# Altium PCB Carrier with Power Supply.PcbDoc (part 1 of 4)
Units mm, origin at the board's own origin, x right, y up, seen from the top; angles counter-clockwise.
Board outline 756.27 x 168 mm, 6 copper layers (Top Layer, Signal Layer 2, Signal Layer 1, VCC, GND, Bottom Layer), stack 1.551 mm thick; 145 components, 326 nets, 1962 pads, 760 vias.
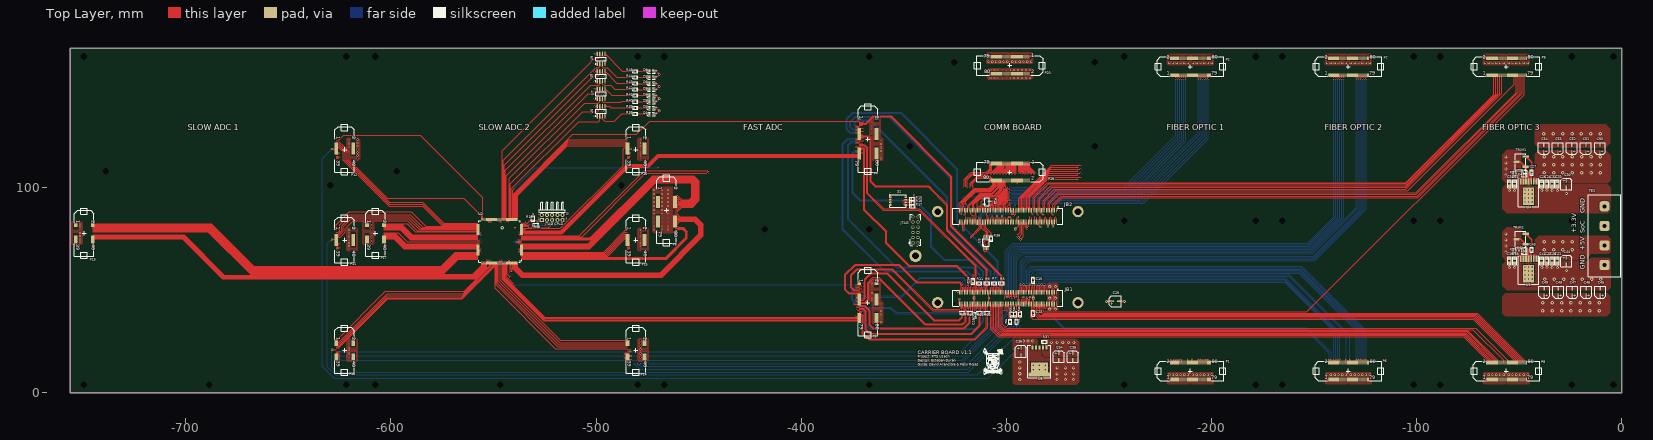
[diagram p0: Top Layer view]
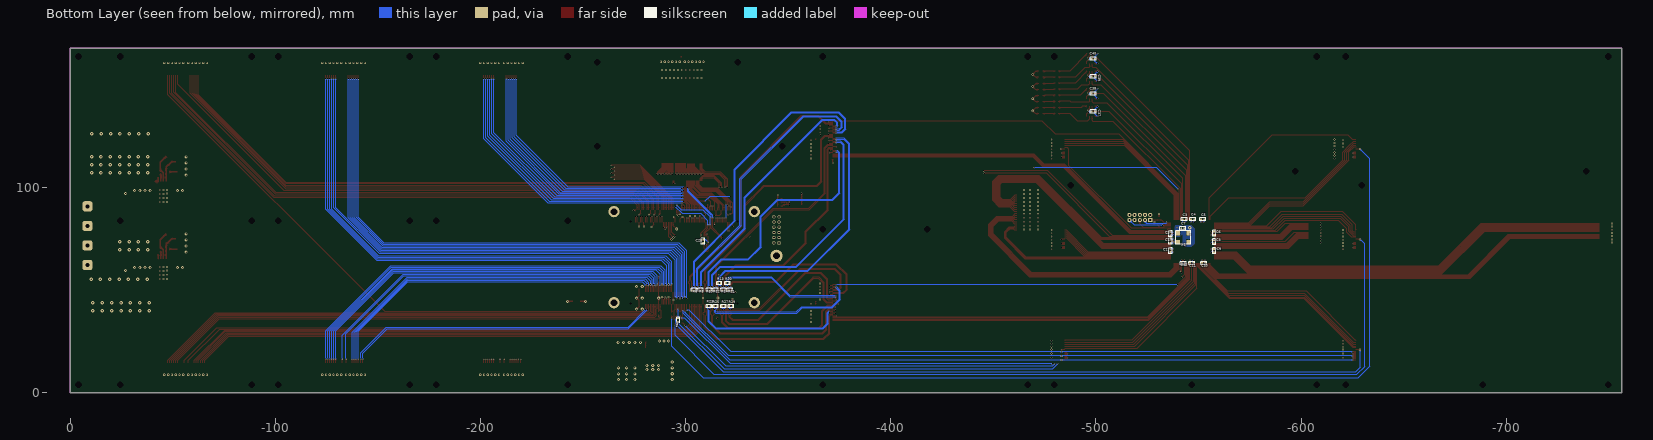
[diagram p1: Bottom Layer view, seen from below]
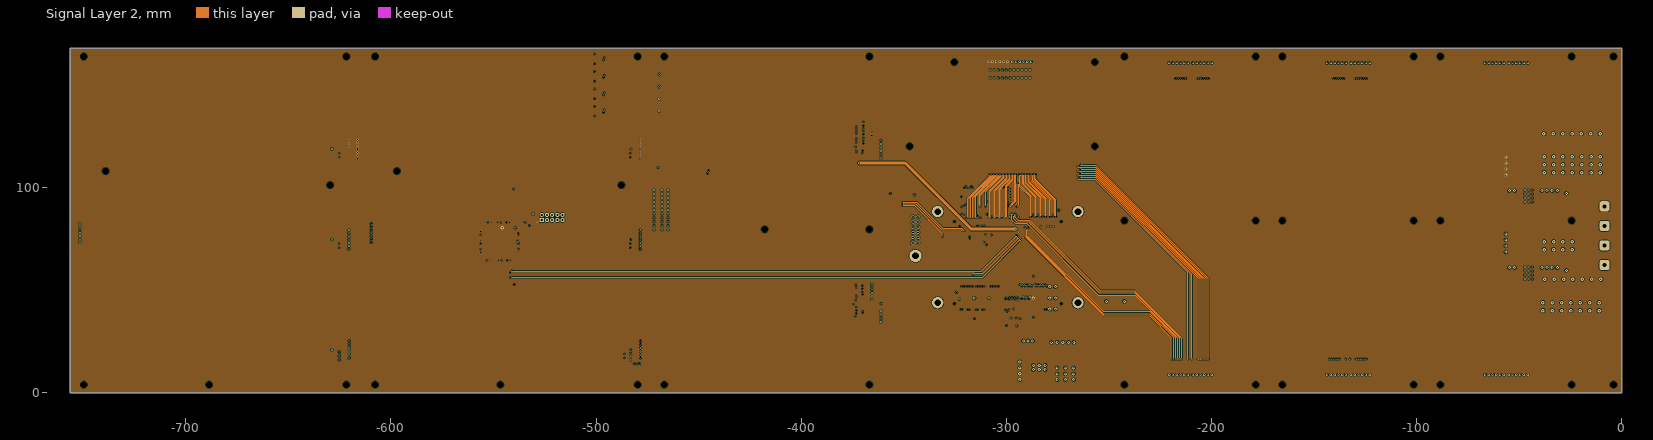
[diagram p2: Signal Layer 2]
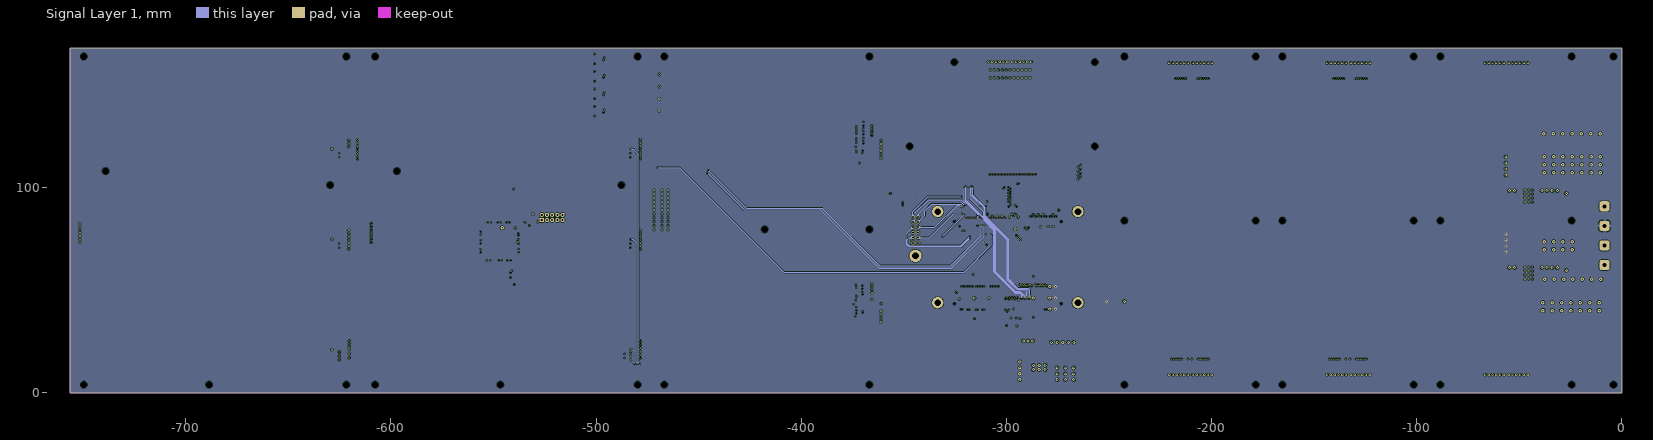
[diagram p3: Signal Layer 1]
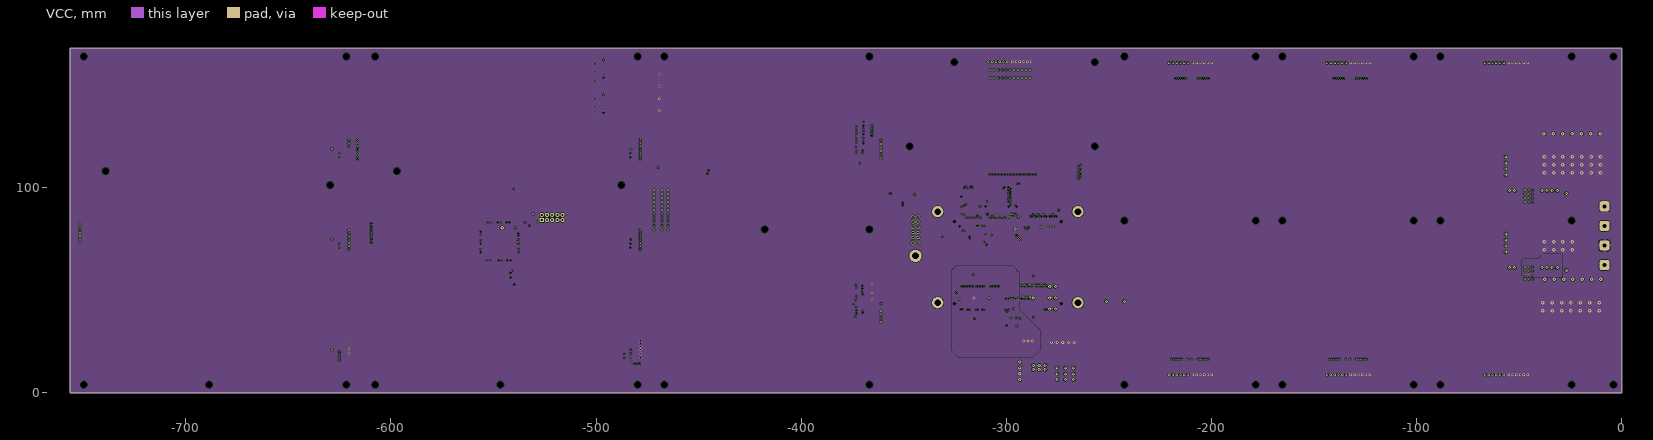
[diagram p4: VCC]
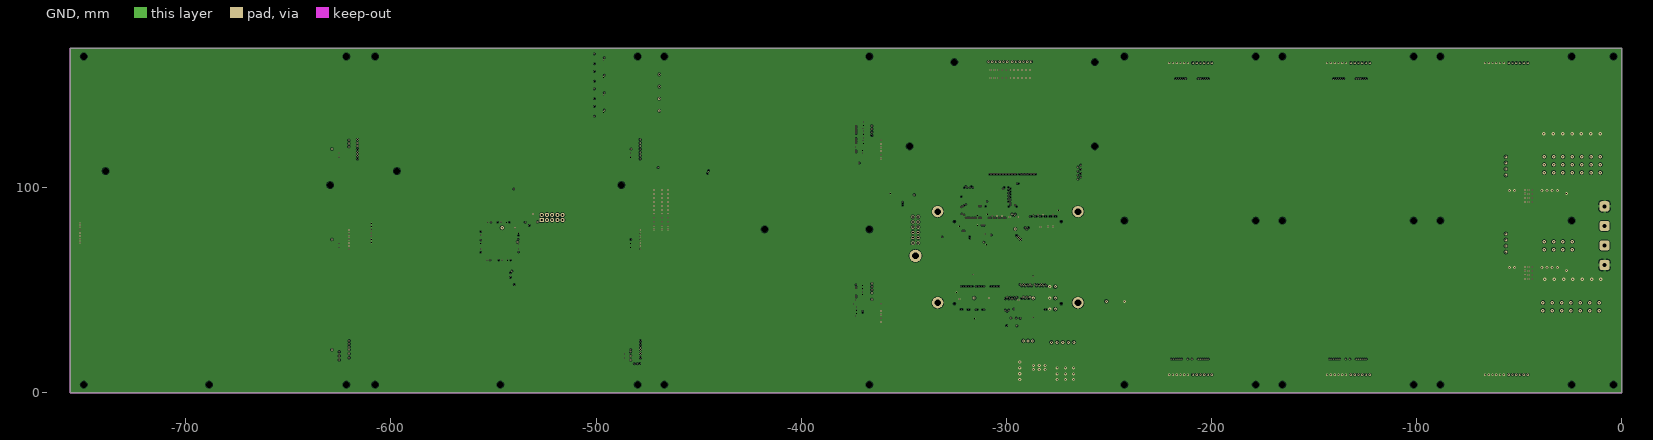
[diagram p5: GND]
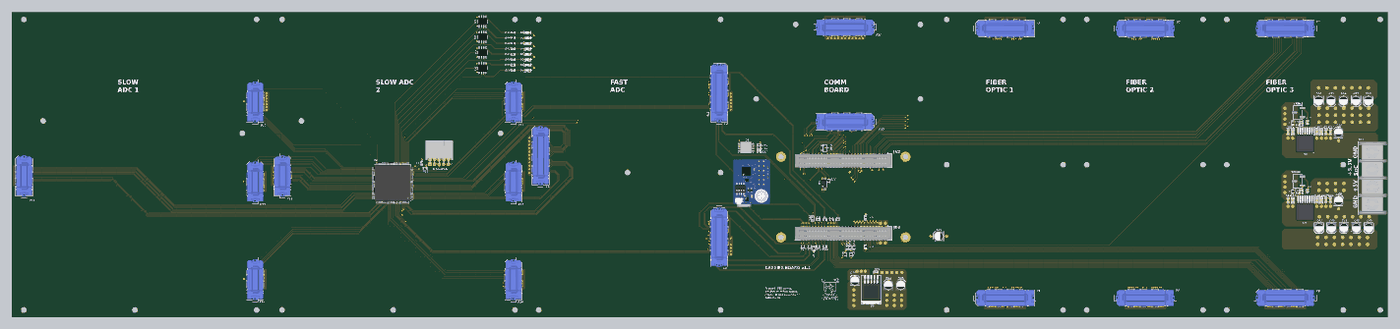
[diagram p9: 3D render of the assembled board from above, using the file's embedded part models]
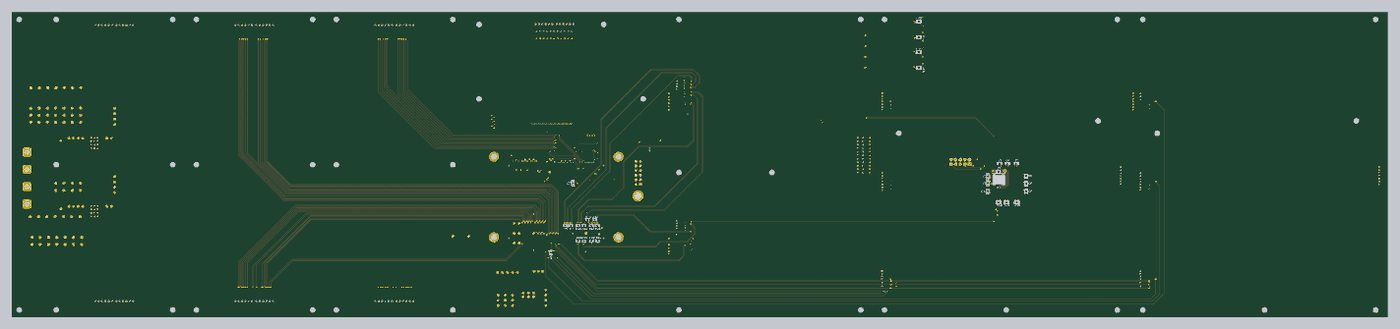
[diagram p10: 3D render of the assembled board from below, using the file's embedded part models]

## Layer stack, top to bottom
Top Solder: solder mask 0.0102, Solder Resist, Dk 3.5
Top Layer: signal copper 0.0356
Dielectric 4: dielectric 0.254, Dk 4.2
Signal Layer 2: signal copper 0.036
Dielectric 5: dielectric 0.254, Dk 4.2
Signal Layer 1: signal copper 0.036
Dielectric 1: dielectric 0.32, FR-4, Dk 4.8
VCC: signal copper 0.036
Dielectric 2: dielectric 0.254, Dk 4.2
GND: signal copper 0.036
Dielectric 3: dielectric 0.254, Dk 4.2
Bottom Layer: signal copper 0.0356
Bottom Solder: solder mask 0.0102, Solder Resist, Dk 3.5

## Board outline
-756.267,0 0,0 0,168 -756.267,168

## Design rules (kind name [scope] priority, off if disabled: settings)
Clearance [All] p1: gap=0.254 except(0.127: Track-Track Track-SMDPad Track-Via; 0.2: SMDPad-SMDPad Via-Via)
ComponentClearance [All] p1: gap=0 collisioncheckmode=3 verticalgap=0 showdistances=FALSE
DiffPairsRouting [All] p1: maxlimit=1 minlimit=0.2 mostfreqgap=0.2 toplayer_minwidth=0.2 toplayer_maxwidth=0.5 toplayer_prefwidth=0.4 midlayer1_minwidth=0.2 midlayer1_maxwidth=0.5 midlayer1_prefwidth=0.4 midlayer2_minwidth=0.2 midlayer2_maxwidth=0.5 midlayer2_prefwidth=0.4 midlayer3_minwidth=0.2 midlayer3_maxwidth=0.5 midlayer3_prefwidth=0.4 midlayer4_minwidth=0.2 midlayer4_maxwidth=0.5 midlayer4_prefwidth=0.4 bottomlayer_minwidth=0.2 bottomlayer_maxwidth=0.5 bottomlayer_prefwidth=0.4 maxuncoupledlength=12.7
Height [All] p1: minheight=0 maxheight=50 prefheight=12.7
HoleSize [All] p1: absolutevalues=TRUE maxlimit=5 minlimit=0.025 maxpercent=80.000 minpercent=20.000
PolygonConnect "Regleta grande" [IsNamedPolygon('VIN33') OR IsNamedPolygon('GND') OR IsNamedPolygon('+5V') vs HasFootprint('Terminal Block 4 pos 15A')] p1: connectstyle=Relief reliefconductorwidth=1.5 reliefentries=4 polygonreliefangle="90 Angle" airgapwidth=0.5
PolygonConnect Vias [IsNamedPolygon('GND_carrier_connector') OR IsNamedPolygon('VIN33_carrier_connector') OR IsNamedPolygon('VIN33_Soc_Top2') OR IsNamedPolygon('VIN_Soc_Top') OR IsNamedPolygon('PLANO VIN') OR IsNamedPolygon('Plano +3.3V_TopLayer') oR IsNamedPolygon('Plano_entrada2_GND') OR IsNamedPolygon('+5V_In referencia') OR IsNamedPolygon('GND_referencia') OR IsNamedPolygon('+2.5V Plano_TOP') OR IsNamedPolygon('+2.5V') OR IsNamedPolygon('Plano_entrada2_+5V') OR IsNamedPolygon('GND_TarjetaHija') OR IsNamedPolygon('+5V_TarjetaHija') OR IsNamedPolygon('GND_TarjetaHija') OR IsNamedPolygon('+3.3V_TarjetaHija') OR IsNamedPolygon('+3.3V') OR IsNamedPolygon('+5V') OR IsNamedPolygon('GND') OR IsNamedPolygon('VIN33') OR IsNamedPolygon('GND OSCILADOR') OR IsNamedPolygon('+3.3V Oscilador') vs isvia] p2: connectstyle=Direct reliefconductorwidth=0.254 reliefentries=4 polygonreliefangle="90 Angle" airgapwidth=0.254
PolygonConnect "Planos conectores tarjetas hijas" [IsNamedPolygon('GND_TarjetaHija') OR IsNamedPolygon('+5V_TarjetaHija') OR IsNamedPolygon('+3.3V_TarjetaHija')] p3: connectstyle=Relief reliefconductorwidth=0.3 reliefentries=4 polygonreliefangle="90 Angle" airgapwidth=0.254
PolygonConnect Planos+3.3V_TI [IsNamedPolygon('Plano_entrada2_GND') OR IsNamedPolygon('Plano_entrada2_+5V') OR HasFootprint('CAP_0603') OR HasFootprint('RES_1206') or HasFootprint('CAP_0805') OR IsNamedPolygon('+5V_In referencia') OR IsNamedPolygon('GND_referencia') OR IsNamedPolygon('+2.5V Plano_TOP')] p4: connectstyle=Relief reliefconductorwidth=0.9 reliefentries=4 polygonreliefangle="90 Angle" airgapwidth=0.254
PolygonConnect Directo [IsNamedPolygon('Plano_entrada_+5V') OR IsNamedPolygon('Plano_entrada_GND') OR IsNamedPolygon('GND_Soc_Top') OR IsNamedPolygon('Plano VIN33_Auxiliar') OR IsNamedPolygon('Plano +3.3V_TopLayer')  OR IsNamedPolygon('Plano_entrada2_GND')] p5: connectstyle=Direct reliefconductorwidth=0.254 reliefentries=4 polygonreliefangle="90 Angle" airgapwidth=0.254
PolygonConnect [All] p6: connectstyle=Relief reliefconductorwidth=0.5 reliefentries=4 polygonreliefangle="90 Angle" airgapwidth=0.254
RoomDefinition Led [InComponentClass('Led')] p1: confinementstyle=ConfineIn formatcopy=TRUE lockcomponents=FALSE outline -508.357,132.078 -466.037,132.078 -466.037,168.008 -508.357,168.008
RoomDefinition Slow_ADC_2 [InComponentClass('Slow_ADC_2')] p2: confinementstyle=ConfineIn formatcopy=TRUE lockcomponents=FALSE outline -611.7,0 -475.7,0 -475.7,168 -611.7,168
RoomDefinition Slow_ADC_1 [InComponentClass('Slow_ADC_1')] p3: confinementstyle=ConfineIn formatcopy=TRUE lockcomponents=FALSE outline -753.7,0 -617.7,0 -617.7,168 -753.7,168
RoomDefinition FO_Daughter3 [InComponentClass('FO_Daughter3')] p4: confinementstyle=ConfineIn formatcopy=TRUE lockcomponents=FALSE outline -92.39,0 -20.39,0 -20.39,168 -92.39,168
RoomDefinition FO_Daughter2 [InComponentClass('FO_Daughter2')] p5: confinementstyle=ConfineIn formatcopy=TRUE lockcomponents=FALSE outline -169.39,0 -97.39,0 -97.39,168 -169.39,168
RoomDefinition FO_Daughter1 [InComponentClass('FO_Daughter1')] p6: confinementstyle=ConfineIn formatcopy=TRUE lockcomponents=FALSE outline -246.39,0 -174.39,0 -174.39,168 -246.39,168
RoomDefinition Fast-ADC [InComponentClass('Fast-ADC')] p7: confinementstyle=ConfineIn formatcopy=TRUE lockcomponents=FALSE outline -470.7,0 -362.7,0 -362.7,168 -470.7,168
RoomDefinition COMM_Board [InComponentClass('COMM_Board')] p8: confinementstyle=ConfineIn formatcopy=TRUE lockcomponents=FALSE outline -353.007,97.398 -251.407,97.398 -251.407,167.998 -353.007,167.998
RoomDefinition "U_Fuente de poder" [InComponentClass('U_Fuente de poder')] p9: confinementstyle=ConfineIn formatcopy=TRUE lockcomponents=FALSE outline -0.01,45.21 -0.01,119.638 -58.647,119.638 -58.647,45.21
RoomDefinition U_CPLD [InComponentClass('U_CPLD')] p10: confinementstyle=ConfineIn formatcopy=TRUE lockcomponents=FALSE outline -511.48,33.205 -511.48,117.115 -561.867,117.115 -561.867,33.205
RoomDefinition U_B2B_JTAG_EEPROM [InComponentClass('U_B2B_JTAG_EEPROM')] p11: confinementstyle=ConfineIn formatcopy=TRUE lockcomponents=FALSE outline -258.037,30.768 -258.037,102.391 -359.857,102.391 -359.857,30.768
RoutingVias [All] p1: holewidth=0.711 width=1.27 viastyle="Through Hole" minholewidth=0.711 minwidth=1.27 maxholewidth=0.711 maxwidth=1.27
SolderMaskExpansion [All] p1: expansion=0.102
Width [All] p1: maxlimit=2 minlimit=0.12 preferedwidth=0.7
26 further rules are at their usual default settings.

## Classes and differential pairs
net class LED[1..8]: LED1 LED2 LED3 LED4 LED5 LED6 LED7 LED8
component class Led: C37 C38 C39 C40 D1 D2 D3 D4 D5 D6 D7 D8 R38 R39 R40 R41 R42 R43 R44 R45 U6 U7 U8 U9
net class TRIP[1..64]: TRIP1 TRIP2 TRIP3 TRIP4 TRIP5 TRIP6 TRIP7 TRIP8 TRIP9 TRIP10 TRIP11 TRIP12 TRIP13 TRIP14 TRIP15 TRIP16 TRIP17 TRIP18 TRIP19 TRIP20 TRIP21 TRIP22 TRIP23 TRIP24 TRIP25 TRIP26 TRIP27 TRIP28 TRIP29 TRIP30 TRIP31 TRIP32 TRIP33 TRIP34 TRIP35 TRIP36 TRIP37 TRIP38 TRIP39 TRIP40 TRIP41 TRIP42 TRIP43 TRIP44 TRIP45 TRIP46 TRIP47 TRIP48 TRIP49 TRIP50 TRIP51 TRIP52 TRIP53 TRIP54 TRIP55 TRIP56 TRIP57 TRIP58 TRIP59 TRIP60 TRIP61 TRIP62 TRIP63 TRIP64
net class SDA[1..2]: SDA1 SDA2
net class SCLK[1..2]: SCLK1 SCLK2
net class RESET_ADC[1..2]: RESET_ADC1 RESET_ADC2
net class PD[1..2]: PD1 PD2
net class MISO_S_ADC[1..6]: MISO_S_ADC1 MISO_S_ADC2 MISO_S_ADC3 MISO_S_ADC4 MISO_S_ADC5 MISO_S_ADC6
net class LCLK_P[1..2]: LCLK_P1 LCLK_P2
net class LCLK_N[1..2]: LCLK_N1 LCLK_N2
net class CS[1..2]: CS1 CS2
net class ADCLK_P[1..2]: ADCLK_P1 ADCLK_P2
net class ADCLK_N[1..2]: ADCLK_N1 ADCLK_N2
net class ADC_P[1..16]: ADC_P1 ADC_P2 ADC_P3 ADC_P4 ADC_P5 ADC_P6 ADC_P7 ADC_P8 ADC_P9 ADC_P10 ADC_P11 ADC_P12 ADC_P13 ADC_P14 ADC_P15 ADC_P16
net class ADC_N[1..16]: ADC_N1 ADC_N2 ADC_N3 ADC_N4 ADC_N5 ADC_N6 ADC_N7 ADC_N8 ADC_N9 ADC_N10 ADC_N11 ADC_N12 ADC_N13 ADC_N14 ADC_N15 ADC_N16
component class Slow_ADC_2: P14 P15 P16 P17
component class Slow_ADC_1: P10 P11 P12 P13
component class FO_Daughter3: P8 P9
component class FO_Daughter2: P6 P7
component class FO_Daughter1: P1 P2
component class Fast-ADC: P3 P4 P5
component class COMM_Board: P19 P20
component class U_B2B_JTAG_EEPROM: C13 C14 C15 C16 C28 JB1 JB2 JTAG P18 R5 R6 R7 R8 R9 R10 R11 R12 R13 R14 R15 R16 R17 R20 R21 R22 R23 R24 R25 R26 R27 R28 R29 R30 R31 R32 R33 R34 R35 R36 S1 U3
component class U_CPLD: C1 C2 C3 C4 C5 C6 C7 C8 C9 C10 C11 C12 C17 "JTAG CPLD" R18 R19 U2 X1
component class "U_Fuente de poder": C18 C19 C20 C21 C22 C23 C24 C25 C26 C27 C29 C30 C31 C32 C33 C34 C35 C36 C41 C42 C43 C44 C45 C46 C47 C48 C49 C50 C51 C52 C53 C54 R1 R2 R3 R4 R37 TB1 TRIM1 TRIM2 U1 U4 U5
net class FO_TX[1..77]: FO_TX1 FO_TX2 FO_TX3 FO_TX4 FO_TX5 FO_TX6 FO_TX7 FO_TX8 FO_TX9 FO_TX10 FO_TX11 FO_TX12 FO_TX13 FO_TX14 FO_TX15 FO_TX16 FO_TX17 FO_TX18 FO_TX19 FO_TX20 FO_TX21 FO_TX22 FO_TX23 FO_TX24 FO_TX25 FO_TX26 FO_TX27 FO_TX28 FO_TX29 FO_TX30 FO_TX31 FO_TX32 FO_TX33 FO_TX34 FO_TX35 FO_TX36 FO_TX37 FO_TX38 FO_TX39 FO_TX40 FO_TX41 FO_TX42 FO_TX43 FO_TX44 FO_TX45 FO_TX46 FO_TX47 FO_TX48 FO_TX49 FO_TX50 FO_TX51 FO_TX52 FO_TX53 FO_TX54 FO_TX55 FO_TX56 FO_TX57 FO_TX58 FO_TX59 FO_TX60 FO_TX61 FO_TX62 FO_TX63 FO_TX64 FO_TX65 FO_TX66 FO_TX67 FO_TX68 FO_TX69 FO_TX70 FO_TX71 FO_TX72 FO_TX73 FO_TX74 FO_TX75 FO_TX76 FO_TX77
net class EOC[1..6]: EOC1 EOC2 EOC3 EOC4 EOC5 EOC6
net class EOC_AND[1..2]: EOC_AND1 EOC_AND2
differential pair PHY_MDI3: +PHY_MDI3_P -PHY_MDI3_N
differential pair PHY_MDI2: +PHY_MDI2_P -PHY_MDI2_N
differential pair PHY_MDI1: +PHY_MDI1_P -PHY_MDI1_N
differential pair PHY_MDI0: +PHY_MDI0_P -PHY_MDI0_N
differential pair LCLK2: +LCLK_P2 -LCLK_N2
differential pair LCLK1: +LCLK_P1 -LCLK_N1
differential pair ADCLK2: +ADCLK_P2 -ADCLK_N2
differential pair ADCLK1: +ADCLK_P1 -ADCLK_N1
differential pair ADC16: +ADC_P16 -ADC_N16
differential pair ADC15: +ADC_P15 -ADC_N15
differential pair ADC14: +ADC_P14 -ADC_N14
differential pair ADC13: +ADC_P13 -ADC_N13
differential pair ADC12: +ADC_P12 -ADC_N12
differential pair ADC11: +ADC_P11 -ADC_N11
differential pair ADC10: +ADC_P10 -ADC_N10
differential pair ADC9: +ADC_P9 -ADC_N9
differential pair ADC8: +ADC_P8 -ADC_N8
differential pair ADC7: +ADC_P7 -ADC_N7
differential pair ADC6: +ADC_P6 -ADC_N6
differential pair ADC5: +ADC_P5 -ADC_N5
differential pair ADC4: +ADC_P4 -ADC_N4
differential pair ADC3: +ADC_P3 -ADC_N3
differential pair ADC2: +ADC_P2 -ADC_N2
differential pair ADC1: +ADC_P1 -ADC_N1
differential pair ERX1: +ERX1_P -ERX1_N
differential pair ERX2: +ERX2_P -ERX2_N
differential pair ETX1: +ETX1_P -ETX1_N
differential pair ETX2: +ETX2_P -ETX2_N
differential pair OTGD: +OTGD_P -OTGD_N

## Components (designator, comment, footprint, x,y, rotation, side; value= is the part's Value field where it differs from the comment)
C1 "100nF" 0603 -536.337,73.915 r90 bottom
C2 "100nF" 0603 -536.33,77.678 r270 bottom
C3 "100nF" 0603 -542.997,84.635 r0 bottom
C4 "100nF" 0603 -547.127,84.635 r180 bottom
C5 "100nF" 0603 -551.987,84.635 r0 bottom
C6 "100nF" 0603 -557.627,77.815 r90 bottom
C7 "100nF" 0603 -542.319,80.225 r180 bottom
C8 "100nF" 0603 -557.627,73.635 r90 bottom
C9 "100nF" 0603 -557.627,69.345 r270 bottom
C10 "100nF" 0603 -552.457,63.255 r0 bottom
C11 "100nF" 0603 -546.677,63.255 r180 bottom
C12 "100nF" 0603 -542.457,63.255 r0 bottom
C13 "100nF" 0603 -286.837,38.861 r90 top
C14 "100nF" 0603 -316.187,54.401 r270 top
C15 "100nF" 0603 -286.837,54.941 r270 top
C16 "100nF" 0603 -315.357,37.948 r90 top
C17 "100nF" 0603 -536.337,69.435 r270 bottom
C18 "47uF" CAP_0805 -52.107,63.279 r180 top
C19 "47uF" CAP_0805 -54.687,63.279 r180 top
C20 "4.7uF" CAP_0805 -33.924,65.599 r0 top
C21 "1uF" CAP_0805 -31.417,65.599 r0 top
C22 "22uF" CAP_0805 -36.431,65.599 r0 top
C23 "47uF" CAP_0805 -52.107,100.928 r180 top
C24 "22uF" CAP_0805 -36.431,103.128 r0 top
C25 "22uF" CAP_0805 -38.937,103.128 r0 top
C26 "75pF" CAP_0603 -48.117,107.778 r90 top
C27 "2.2nF" CAP_0603 -43.917,106.778 r180 top
C28 "100nF" 0603 -308.437,73.918 r90 bottom
C29 "22uF" "CAP Electrolítico Radial SMD2" -248.647,44.628 r90 top
C30 "22uF" "CAP Electrolítico Radial SMD2" -26.967,103.608 r0 top
C31 "47uF" CAP_0805 -54.687,100.928 r180 top
C32 "4.7uF" CAP_0805 -33.924,103.128 r0 top
C33 "1uF" CAP_0805 -31.417,103.128 r0 top
C34 "47uF" "CAP Electrolítico Radial SMD2" -274.432,19.53 r0 top
C35 "47uF" "CAP Electrolítico Radial SMD2" -267.612,19.53 r0 top
C36 "47uF" "CAP Electrolítico Radial SMD2" -292.86,22.02 r0 top
C37 "100nF" 0603 -498.614,137.218 r180 bottom
C38 "100nF" 0603 -498.614,145.888 r180 bottom
C39 "100nF" 0603 -498.614,154.308 r180 bottom
C40 "100nF" 0603 -498.614,162.898 r180 bottom
C41 "22uF" CAP_0805 -38.937,65.599 r0 top
C42 "75pF" CAP_0603 -48.117,70.129 r90 top
C43 "2.2nF" CAP_0603 -43.917,69.129 r180 top
C44 "22uF" "CAP Electrolítico Radial SMD2" -26.967,66.079 r0 top
C45 "22uF" "CAP Electrolítico Radial SMD2" -10.383,47.37 r180 top
C46 "22uF" "CAP Electrolítico Radial SMD2" -17.213,47.37 r180 top
C47 "22uF" "CAP Electrolítico Radial SMD2" -24.033,47.37 r180 top
C48 "22uF" "CAP Electrolítico Radial SMD2" -30.863,47.37 r180 top
C49 "22uF" "CAP Electrolítico Radial SMD2" -37.693,47.37 r180 top
C50 "22uF" "CAP Electrolítico Radial SMD2" -10.603,117.38 r180 top
C51 "22uF" "CAP Electrolítico Radial SMD2" -17.433,117.38 r180 top
C52 "22uF" "CAP Electrolítico Radial SMD2" -24.263,117.38 r180 top
C53 "22uF" "CAP Electrolítico Radial SMD2" -31.083,117.38 r180 top
C54 "22uF" "CAP Electrolítico Radial SMD2" -37.913,117.38 r180 top
D1 "LED" LED_0805_GREEN -473.052,136.021 r180 top
D2 "LED" LED_0805_GREEN -473.052,138.981 r180 top
D3 "LED" LED_0805_GREEN -473.052,141.94 r180 top
D4 "LED" LED_0805_GREEN -473.052,144.9 r180 top
D5 "LED" LED_0805_GREEN -473.052,147.86 r180 top
D6 "LED" LED_0805_GREEN -473.052,150.82 r180 top
D7 "LED" LED_0805_GREEN -473.052,153.779 r180 top
D8 "LED" LED_0805_GREEN -473.052,156.739 r180 top
JB1 "Conector B2B izq" "BSE-060-01-L-D-A (trenz)" -275.637,49.056 r180 top locked
JB2 "Conector B2B der" "BSE-060-01-L-D-A (trenz)" -275.637,89.056 r180 top locked
JTAG "Header 6X2" "JTAG SOC BASE" -344.258,79.518 r180 top
"JTAG CPLD" "Header JTAG_MAXII" "HEADER_JTAG - MAXII Horizontal" -516.28,86.8 r180 top
P1 "Conector 40x2 (Header)" "Conector 80 Pines Macho" -210.226,10.673 r0 top locked
P2 "Conector 40x2 (Header)" "Conector 80 Pines Macho" -210.226,159.057 r0 top locked
P3 "Conector 40x2 (Header)" "Conector 80 Pines Macho" -367.46,44.048 r270 top locked
P4 "Conector 40x2 (Header)" "Conector 80 Pines Macho" -367.46,123.728 r270 top locked
P5 "Conector 40x2 (Header)" "Conector 80 Pines Macho" -465.616,89.075 r270 top locked
P6 "Conector 40x2 (Header)" "Conector 80 Pines Macho" -133.226,10.673 r0 top locked
P7 "Conector 40x2 (Header)" "Conector 80 Pines Macho" -133.226,159.057 r0 top locked
P8 "Conector 40x2 (Header)" "Conector 80 Pines Macho" -56.226,10.673 r0 top locked
P9 "Conector 40x2 (Header)" "Conector 80 Pines Macho" -56.226,159.057 r0 top locked
P10 "Conector 20x2 (Header)" "Conector 40 Pines Macho" -622.54,20.804 r270 top
P11 "Conector 20x2 (Header)" "Conector 40 Pines Macho" -622.54,74.554 r270 top locked
P12 "Conector 20x2 (Header)" "Conector 40 Pines Macho" -622.54,118.658 r270 top
P13 "Conector 20x2 (Header)" "Conector 40 Pines Macho" -749.514,77.819 r270 top
P14 "Conector 20x2 (Header)" "Conector 40 Pines Macho" -480.54,20.804 r270 top locked
P15 "Conector 20x2 (Header)" "Conector 40 Pines Macho" -480.54,74.554 r270 top locked
P16 "Conector 20x2 (Header)" "Conector 40 Pines Macho" -480.54,118.658 r270 top locked
P17 "Conector 20x2 (Header)" "Conector 40 Pines Macho" -607.514,77.819 r270 top
P18 "S9345-ND + S9011E-03-ND" "Header 3 posiciones macho SMD" -308.43,95.24 r270 top
P19 "Conector 40x2 (Header)" "Conector 80 Pines Macho" -298.27,107.673 r180 top locked
P20 "Conector 40x2 (Header)" "Conector 80 Pines Macho" -298.27,159.678 r180 top locked
R1 "100k" RES_0603 -46.667,68.449 r270 top
R2 "464" RES_0603 -52.067,68.539 r180 top
R3 "464" RES_0603 -52.067,106.188 r180 top
R4 "100k" RES_0603 -46.667,106.098 r270 top
R5 "100" RES_0603 -303.04,53.528 r90 top
R6 "100" RES_0603 -304.87,50.268 r270 bottom
R7 "100" RES_0603 -306.64,53.528 r90 top
R8 "100" RES_0603 -308.06,50.268 r270 bottom
R9 "100" RES_0603 -310.22,53.528 r90 top
R10 "100" RES_0603 -312.1,50.268 r270 bottom
R11 "100" RES_0603 -313.98,53.528 r90 top
R12 "100" RES_0603 -315.27,50.268 r270 bottom
R13 "100" RES_0603 -317.157,53.531 r270 bottom
R14 "100" RES_0603 -319.23,50.268 r270 bottom
R15 "10k" RES_0603 -346.43,94.59 r90 top
R16 "10k" RES_0603 -346.43,92.85 r90 top
R17 "10k" RES_0603 -346.43,91.08 r90 top
R18 "10k" RES_0603 -528.46,81.918 r270 top
R19 "1k" RES_0603 -530.73,85.85 r0 top
R20 "100" RES_0603 -321.167,53.528 r270 bottom
R21 "100" RES_0603 -322.47,50.268 r270 bottom
R22 "100" RES_0603 -308.62,39.068 r270 top
R23 "100" RES_0603 -310.477,42.288 r90 bottom
R24 "100" RES_0603 -312.237,39.068 r270 top
R25 "100" RES_0603 -313.677,42.288 r90 bottom
R26 "100" RES_0603 -316.897,39.068 r270 top
R27 "100" RES_0603 -317.657,42.288 r90 bottom
R28 "100" RES_0603 -320.657,39.068 r270 top
R29 "100" RES_0603 -321.277,42.288 r90 bottom
R30 "0" RES_0603 -293.237,37.708 r180 top
R31 "0" RES_0603 -294.837,33.878 r180 top
R32 "0" RES_0603 -295.637,37.708 r180 top
R33 "0" RES_0603 -296.437,34.778 r0 bottom
R34 "0" RES_0603 -297.237,37.708 r180 top
R35 "0" RES_0603 -298.037,33.878 r180 top
R36 "10k" RES_0603 -307.25,74.438 r180 top
R37 "10k" RES_0603 -280.53,24.89 r270 top
R38 "680" RES_0603 -481.64,136.15 r90 top
R39 "680" RES_0603 -481.64,139.11 r90 top
R40 "680" RES_0603 -481.64,142.069 r90 top
R41 "680" RES_0603 -481.64,145.029 r90 top
R42 "680" RES_0603 -481.64,147.989 r90 top
R43 "680" RES_0603 -481.64,150.949 r90 top
R44 "680" RES_0603 -481.64,153.908 r90 top
R45 "680" RES_0603 -481.64,156.868 r90 top
S1 "SW-DIP4" "Dip Switch x 4" -348.93,91.62 r90 top
TB1 "Terminal Block 4 pos 15A" "Terminal Block 4 pos 15A" -16.234,56.593 r90 top
TRIM1 "50k" TRIM_50k -46.797,110.188 r90 top
TRIM2 "50k" TRIM_50k -46.797,72.459 r90 top
U1 "LMZ10505" TO-PMOD-7 -45.387,65.469 r180 top
U2 "EPM570T144C5N" 144-TQFP -546.947,73.928 r180 top
U3 "24LC128-I/ST" 8-TSSOP -309.92,73.43 r90 top
U4 "LMZ10505" TO-PMOD-7 -45.387,103.118 r180 top
U5 "LP3964ES-2.5NOPB" "DDPAK 5 pines" -283.83,8.935 r180 top
U6 "SN75451BD" SOIC8_N -497.51,137.308 r270 top
U7 "SN75451BD" SOIC8_N -497.51,145.825 r270 top
U8 "SN75451BD" SOIC8_N -497.51,154.341 r270 top
U9 "SN75451BD" SOIC8_N -497.51,162.858 r270 top
X1 "Oscilador" CRYSTALOSC -544.957,73.355 r0 bottom

## Footprints (in the part's own frame and the unit in brackets; to place one, negate y for a bottom-side part, rotate by r counter-clockwise, add the part's x,y. Pads: shape width x height; smd on the part's side, far side on the other; paste and mask are expansions set on the pad)
8-TSSOP [mm] "TSSOP, 8 Leads, Body 3.1x4.5mm (max), Pitch 0.65mm, IPC Medium Density"
  round 0.508 on Mech15: 0(0,0)
  oval 1.5x0.4 smd paste-0.051: 1(-2.9,0.975) 2(-2.9,0.325) 3(-2.9,-0.325) 4(-2.9,-0.975) 5(2.9,-0.975) 6(2.9,-0.325) 7(2.9,0.325) 8(2.9,0.975)
  silkscreen extent -1.8,-1.6 1.8,1.6, body extent -3.25,-1.55 3.25,1.55, height 1.19
144-TQFP [mil] "Pitch 0.5mm"
  rect 58x11 smd: 1(-418,344.49) 2(-418,324.8) 3(-418,305.12) 4(-418,285.43) 5(-418,265.75) 6(-418,246.06) 7(-418,226.38) 8(-418,206.69) 9(-418,187.01) 10(-418,167.32) 11(-418,147.64) 12(-418,127.95) 13(-418,108.27) 14(-418,88.58) 15(-418,68.9) 16(-418,49.21) 17(-418,29.53) 18(-418,9.84) 19(-418,-9.84) 20(-418,-29.53) 21(-418,-49.21) 22(-418,-68.9) 23(-418,-88.58) 24(-418,-108.27) 25(-418,-127.95) 26(-418,-147.64) 27(-418,-167.32) 28(-418,-187.01) 29(-418,-206.69) 30(-418,-226.38) 31(-418,-246.06) 32(-418,-265.75) 33(-418,-285.43) 34(-418,-305.12) 35(-418,-324.8) 36(-418,-344.49) 73(418,-344.49) 74(418,-324.8) 75(418,-305.12) 76(418,-285.43) 77(418,-265.75) 78(418,-246.06) 79(418,-226.38) 80(418,-206.69) 81(418,-187.01) 82(418,-167.32) 83(418,-147.64) 84(418,-127.95) 85(418,-108.27) 86(418,-88.58) 87(418,-68.9) 88(418,-49.21) 89(418,-29.53) 90(418,-9.84) 91(418,9.84) 92(418,29.53) 93(418,49.21) 94(418,68.9) 95(418,88.58) 96(418,108.27) 97(418,127.95) 98(418,147.64) 99(418,167.32) 100(418,187.01) 101(418,206.69) 102(418,226.38) 103(418,246.06) 104(418,265.75) 105(418,285.43) 106(418,305.12) 107(418,324.8) 108(418,344.49)
  rect 11x58 smd: 37(-344.49,-418) 38(-324.8,-418) 39(-305.12,-418) 40(-285.43,-418) 41(-265.75,-418) 42(-246.06,-418) 43(-226.38,-418) 44(-206.69,-418) 45(-187.01,-418) 46(-167.32,-418) 47(-147.64,-418) 48(-127.95,-418) 49(-108.27,-418) 50(-88.58,-418) 51(-68.9,-418) 52(-49.21,-418) 53(-29.53,-418) 54(-9.84,-418) 55(9.84,-418) 56(29.53,-418) 57(49.21,-418) 58(68.9,-418) 59(88.58,-418) 60(108.27,-418) 61(127.95,-418) 62(147.64,-418) 63(167.32,-418) 64(187.01,-418) 65(206.69,-418) 66(226.38,-418) 67(246.06,-418) 68(265.75,-418) 69(285.43,-418) 70(305.12,-418) 71(324.8,-418) 72(344.49,-418) 109(344.49,418) 110(324.8,418) 111(305.12,418) 112(285.43,418) 113(265.75,418) 114(246.06,418) 115(226.38,418) 116(206.69,418) 117(187.01,418) 118(167.32,418) 119(147.64,418) 120(127.95,418) 121(108.27,418) 122(88.58,418) 123(68.9,418) 124(49.21,418) 125(29.53,418) 126(9.84,418) 127(-9.84,418) 128(-29.53,418) 129(-49.21,418) 130(-68.9,418) 131(-88.58,418) 132(-108.27,418) 133(-127.95,418) 134(-147.64,418) 135(-167.32,418) 136(-187.01,418) 137(-206.69,418) 138(-226.38,418) 139(-246.06,418) 140(-265.75,418) 141(-285.43,418) 142(-305.12,418) 143(-324.8,418) 144(-344.49,418)
  silkscreen extent -426,-399 399,399, body extent -433,-433 433,433, height 63
0603 [mm]
  rect 0.9x1 smd: 1(0.801,0) 2(-0.775,0)
  silkscreen extent -1.45,-0.8 1.47,0.8, body extent -0.85,-0.45 0.85,0.45, height 0.55
"BSE-060-01-L-D-A (trenz)" [mm]
  rrect20% 0.41x2.273 smd: 1(0,0) 2(0,5.728) 3(0.8,0) 4(0.8,5.728) 5(1.6,0) 6(1.6,5.728) 7(2.4,0) 8(2.4,5.728) 9(3.2,0) 10(3.2,5.728) 11(4,0) 12(4,5.728) 13(4.8,0) 14(4.8,5.728) 15(5.6,0) 16(5.6,5.728) 17(6.4,0) 18(6.4,5.728) 19(7.2,0) 20(7.2,5.728) 21(8,0) 22(8,5.728) 23(8.8,0) 24(8.8,5.728) 25(9.6,0) 26(9.6,5.728) 27(10.4,0) 28(10.4,5.728) 29(11.2,0) 30(11.2,5.728) 31(12,0) 32(12,5.728) 33(12.8,0) 34(12.8,5.728) 35(13.6,0) 36(13.6,5.728) 37(14.4,0) 38(14.4,5.728) 39(15.2,0) 40(15.2,5.728) 41(16,0) 42(16,5.728) 43(16.8,0) 44(16.8,5.728) 45(17.6,0) 46(17.6,5.728) 47(18.4,0) 48(18.4,5.728) 49(19.2,0) 50(19.2,5.728) 51(20,0) 52(20,5.728) 53(20.8,0) 54(20.8,5.728) 55(21.6,0) 56(21.6,5.728) 57(22.4,0) 58(22.4,5.728) 59(23.2,0) 60(23.2,5.728) 61(24,0) 62(24,5.728) 63(24.8,0) 64(24.8,5.728) 65(25.6,0) 66(25.6,5.728) 67(26.4,0) 68(26.4,5.728) 69(27.2,0) 70(27.2,5.728) 71(28,0) 72(28,5.728) 73(28.8,0) 74(28.8,5.728) 75(29.6,0) 76(29.6,5.728) 77(30.4,0) 78(30.4,5.728) 79(31.2,0) 80(31.2,5.728) 81(32,0) 82(32,5.728) 83(32.8,0) 84(32.8,5.728) 85(33.6,0) 86(33.6,5.728) 87(34.4,0) 88(34.4,5.728) 89(35.2,0) 90(35.2,5.728) 91(36,0) 92(36,5.728) 93(36.8,0) 94(36.8,5.728) 95(37.6,0) 96(37.6,5.728) 97(38.4,0) 98(38.4,5.728) 99(39.2,0) 100(39.2,5.728) 101(40,0) 102(40,5.728) 103(40.8,0) 104(40.8,5.728) 105(41.6,0) 106(41.6,5.728) 107(42.4,0) 108(42.4,5.728) 109(43.2,0) 110(43.2,5.728) 111(44,0) 112(44,5.728) 113(44.8,0) 114(44.8,5.728) 115(45.6,0) 116(45.6,5.728) 117(46.4,0) 118(46.4,5.728) 119(47.2,0) 120(47.2,5.728)
  round 0.5 hole 1.02 unplated mask+0: ""(-2.439,5.531) ""(49.639,5.531)
  Top Layer pour cut-out: 50.445,5.511 50.418,5.72 50.337,5.914 50.209,6.082 50.042,6.21 49.847,6.29 49.639,6.318 49.43,6.29 49.235,6.21 49.068,6.082 48.94,5.914 48.859,5.72 48.832,5.511 48.859,5.302 48.94,5.108 49.068,4.94 49.235,4.812 49.43,4.732 49.639,4.704 49.847,4.732 50.042,4.812 50.209,4.94 50.337,5.108 50.418,5.302
  Top Layer pour cut-out: -1.642,5.501 -1.67,5.71 -1.75,5.904 -1.878,6.072 -2.046,6.2 -2.24,6.28 -2.449,6.308 -2.658,6.28 -2.852,6.2 -3.02,6.072 -3.148,5.904 -3.228,5.71 -3.256,5.501 -3.228,5.292 -3.148,5.098 -3.02,4.93 -2.852,4.802 -2.658,4.722 -2.449,4.694 -2.24,4.722 -2.046,4.802 -1.878,4.93 -1.75,5.098 -1.67,5.292
  silkscreen extent -3.22,-1.61 50.41,6.78, body extent -3.04,-0.88 50.24,6.61, height 3.23
"CAP Electrolítico Radial SMD2" [mm] "Mediano"
  rect 0.65x2.2 smd: 1(0,0) 2(0,-3.7)
  silkscreen extent -2.65,-4.61 2.65,1.14, body extent -2.66,-4.79 2.64,1.11, height 5.41
CAP_0603 [mm] "CAP CER 0603"
  rect 1.2x0.8 smd: 1(0,0) 2(0,-1.4)
  silkscreen extent -0.76,-1.96 0.76,0.56, body extent -0.39,-1.45 0.41,0.15, height 0.4
CAP_0805 [mm] "CAP CER 0805"
  rect 1.55x1.35 smd: 1(0,0) 2(0,-2.2)
  silkscreen extent -0.94,-3.04 0.94,0.84, body extent -0.62,-2.1 0.63,-0.1, height 0.3
"Conector 40 Pines Macho" [mm] "SMD pitch 0.5mm 2 filas"
  rect 0.3x1.8 smd: 1(-4.75,-4.15) 2(-4.75,4.15) 3(-4.25,-4.15) 4(-4.25,4.15) 5(-3.75,-4.15) 6(-3.75,4.15) 7(-3.25,-4.15) 8(-3.25,4.15) 9(-2.75,-4.15) 10(-2.75,4.15) 11(-2.25,-4.15) 12(-2.25,4.15) 13(-1.75,-4.15) 14(-1.75,4.15) 15(-1.25,-4.15) 16(-1.25,4.15) 17(-0.75,-4.15) 18(-0.75,4.15) 19(-0.25,-4.15) 20(-0.25,4.15) 21(0.25,-4.15) 22(0.25,4.15) 23(0.75,-4.15) 24(0.75,4.15) 25(1.25,-4.15) 26(1.25,4.15) 27(1.75,-4.15) 28(1.75,4.15) 29(2.25,-4.15) 30(2.25,4.15) 31(2.75,-4.15) 32(2.75,4.15) 33(3.25,-4.15) 34(3.25,4.15) 35(3.75,-4.15) 36(3.75,4.15) 37(4.25,-4.15) 38(4.25,4.15) 39(4.75,-4.15) 40(4.75,4.15)
  silkscreen extent -12.23,-4.75 12.2,4.75, body extent -11.2,-4.75 11.2,4.75, height 13.2
"Conector 80 Pines Macho" [mm] "SMD pitch 0.5mm 2 filas"
  rect 0.3x1.8 smd: 1(-9.75,-4.15) 2(-9.75,4.15) 3(-9.25,-4.15) 4(-9.25,4.15) 5(-8.75,-4.15) 6(-8.75,4.15) 7(-8.25,-4.15) 8(-8.25,4.15) 9(-7.75,-4.15) 10(-7.75,4.15) 11(-7.25,-4.15) 12(-7.25,4.15) 13(-6.75,-4.15) 14(-6.75,4.15) 15(-6.25,-4.15) 16(-6.25,4.15) 17(-5.75,-4.15) 18(-5.75,4.15) 19(-5.25,-4.15) 20(-5.25,4.15) 21(-4.75,-4.15) 22(-4.75,4.15) 23(-4.25,-4.15) 24(-4.25,4.15) 25(-3.75,-4.15) 26(-3.75,4.15) 27(-3.25,-4.15) 28(-3.25,4.15) 29(-2.75,-4.15) 30(-2.75,4.15) 31(-2.25,-4.15) 32(-2.25,4.15) 33(-1.75,-4.15) 34(-1.75,4.15) 35(-1.25,-4.15) 36(-1.25,4.15) 37(-0.75,-4.15) 38(-0.75,4.15) 39(-0.25,-4.15) 40(-0.25,4.15) 41(0.25,-4.15) 42(0.25,4.15) 43(0.75,-4.15) 44(0.75,4.15) 45(1.25,-4.15) 46(1.25,4.15) 47(1.75,-4.15) 48(1.75,4.15) 49(2.25,-4.15) 50(2.25,4.15) 51(2.75,-4.15) 52(2.75,4.15) 53(3.25,-4.15) 54(3.25,4.15) 55(3.75,-4.15) 56(3.75,4.15) 57(4.25,-4.15) 58(4.25,4.15) 59(4.75,-4.15) 60(4.75,4.15) 61(5.25,-4.15) 62(5.25,4.15) 63(5.75,-4.15) 64(5.75,4.15) 65(6.25,-4.15) 66(6.25,4.15) 67(6.75,-4.15) 68(6.75,4.15) 69(7.25,-4.15) 70(7.25,4.15) 71(7.75,-4.15) 72(7.75,4.15) 73(8.25,-4.15) 74(8.25,4.15) 75(8.75,-4.15) 76(8.75,4.15) 77(9.25,-4.15) 78(9.25,4.15) 79(9.75,-4.15) 80(9.75,4.15)
  silkscreen extent -17.23,-4.75 17.23,4.75, body extent -16.19,-4.75 16.21,4.75, height 13.2
CRYSTALOSC [mm]
  rect 1.8x2 smd: 1(-0.12,-4.5) 2(4.96,-4.5) 3(4.96,-0.32) 4(-0.12,-0.3)
  silkscreen extent -1.29,-5.72 6.13,0.89, body extent -1.04,-4.86 5.96,0.14, height 1.7
"DDPAK 5 pines" [mm] "5 lead"
  rect 1.07x2.16 smd: 1(-3.4,-13.215) 2(-1.7,-13.215) 3(0,-13.215) 4(1.7,-13.215) 5(3.4,-13.215)
  rect 10.8x1.91 smd: 6(0,0)
  rect 8.33x5.08 smd: 6(0,-3.4)
  silkscreen extent -5.57,-14.25 5.6,1.5, body extent -5.31,-14.25 5.33,1.61, height 4.8
"Dip Switch x 4" [mm]
  rect 0.76x1.27 smd: 1(0,0) 2(1.27,0) 3(2.54,0) 4(3.81,0) 5(3.81,7.62) 6(2.54,7.62) 7(1.27,7.62) 8(0,7.59)
  silkscreen extent -1.21,-0.23 5.01,7.88, body extent -1.22,-0.24 4.98,7.88, height 2.3
"Header 3 posiciones macho SMD" [mm] "Pitch 1.27mm"
  rect 0.71x1.7 smd: 1(0.7,-2.33) 2(1.9,0.47) 3(3.24,-2.33)
  silkscreen extent 0.07,-2.05 3.88,0.09
"HEADER_JTAG - MAXII Horizontal" [mm] "Connector; Header; 5x2 Position; Right Angle"
  rect 2x2 hole 1: 1(10.16,2.54)
  round 2 hole 1: 2(10.16,0) 3(7.62,2.54) 4(7.62,0) 5(5.08,2.54) 6(5.08,0) 7(2.54,2.54) 8(2.54,0) 9(0,2.54) 10(0,0)
  silkscreen extent -1.27,-6.35 11.43,-1.27, body extent -2.44,-10.64 12.6,2.8, height 9.87
"JTAG SOC BASE" [mm]
  rect 1.5x1.5 hole 1: 1(1.27,6.35)
  round 1.5 hole 1: 2(-1.27,6.35) 3(1.27,3.81) 4(-1.27,3.81) 5(1.27,1.27) 6(-1.27,1.27) 7(1.27,-1.27) 8(-1.27,-1.27) 9(1.27,-3.81) 10(-1.27,-3.81) 11(1.27,-6.35) 12(-1.27,-6.35)
  round 6 hole 3.2: H1(0,12.7)
  silkscreen extent -2.54,-7.62 3.27,7.62, body extent -4.78,-7.75 15.24,18.7, height 14.23
LED_0805_GREEN [mm] "Chip LED, 2-Leads, Body 2.0x1.3mm, IPC Medium Density"
  rect 1.1x1.2 smd: 1(-1.05,0) 2(1.05,0)
  silkscreen extent -1.91,-0.89 2.03,0.89, body extent -1,-0.63 1,0.62, height 0.68
RES_0603 [mm] "RES 0603"
  rect 1.2x0.7 smd: 1(0,0) 2(0,-1.6)
  silkscreen extent -0.76,-2.11 0.76,0.51, body extent -0.45,-1.59 0.45,0.01, height 0.5
SOIC8_N [mm] "SOIC, 8-Leads, Body 4.9x3.9mm, Pitch 1.27mm, IPC Medium Density"
  oval 2.2x0.6 smd: 1(2.4,-1.905) 2(2.4,-0.635) 3(2.4,0.635) 4(2.4,1.905) 5(-2.4,1.905) 6(-2.4,0.635) 7(-2.4,-0.635) 8(-2.4,-1.905)
  silkscreen extent -0.9,-2.88 2.52,2.5, body extent -3.08,-2.5 3.08,2.5, height 2
"Terminal Block 4 pos 15A" [mm] "Molex"
  rrect50% 5x5 hole 2: 1(5.786,-7.884) 2(15.316,-7.884) 3(24.846,-7.884) 4(34.376,-7.884)
  silkscreen extent 0,-15.75 40.13,0, body extent 0,-15.75 40.13,0, height 16.76
TO-PMOD-7 [mm]
  rect 0.89x3.06 smd: 1(-3.81,0) 2(-2.54,0) 3(-1.27,0) 4(0,0) 5(1.27,0) 6(2.54,0) 7(3.81,0)
  rect 5.35x8.54 smd: 8(0,7.305)
  silkscreen extent -4.92,-1.51 5.1,12.44, body extent -5.06,-1.39 5.1,12.39, height 4.57
TRIM_50k [mm] "Vishay Series TS63"
  rect 1.2x3 smd: a(0,0) b(2.54,4.5) c(5.08,0)
  silkscreen extent -1.35,0 6.44,5

## Part data
C1 C2 C3 C4 C5 C6 C7 C8 C9 C10 C11 C12 C13 C14 C15 C16 C17 C26 C27 C28 C37 C38 C39 C40 C42 C43: library part Cap_0603, "Capacitor"
C18 C19 C20 C21 C22 C23 C24 C25 C31 C32 C33 C41: library part Cap_0805, "Capacitor"
C29 C30 C34 C35 C36 C44 C45 C46 C47 C48 C49 C50 C51 C52 C53 C54: library part "Cap Pol", "Polarized Capacitor (Radial)"
D1 D2 D3 D4 D5 D6 D7 D8: library part LED2, "LED Magenta"
JTAG: "Header, 6-Pin, Dual row"
"JTAG CPLD": "Header, 5-Pin, Dual row, Vertical"
P1 P2 P3 P4 P5 P6 P7 P8 P9 P19 P20: library part "Header 40X2 Macho (Hirose)", "CONN HDR 80POS 0.5MM SMD"
P10 P11 P12 P13 P14 P15 P16 P17: library part "Header 20X2 Macho (Hirose)", "CONN HDR 40POS 0.5MM SMD"
P18: library part "Jumper 3 pos", "SMD Macho Pitch 1.27mm"
R1 R2 R3 R4 R5 R6 R7 R8 R9 R10 R11 R12 R13 R14 R15 R16 R17 R18 R19 R20 R21 R22 R23 R24 R25 R26 R27 R28 R29 R30 R31 R32 R33 R34 R35 R36 R37 R38 R39 R40 R41 R42 R43 R44 R45: library part Res0603
S1: "DIP Switch"
TB1: "Molex Through Hole"
TRIM1 TRIM2: library part Potenciometro, "Trimmer"
U1 U4: "DC-DC Buck Variable"
U2: "CPLD Altera MAXII"
U3: library part "IC EEPROM 128KBIT"
U5: library part "Regulador Lineal 2.5V 800mA DDPAK", "IC REG LIN 2.5V 800MA DDPAK"
U6 U7 U8 U9: "Dual Peripheral Driver"
X1: "Oscilador 50MHz"

## Free pads (board coordinates)
  round 1 hole 3.2 mask+0.102: ""(-749.7,4) ""(-607.7,4)
  round 1 hole 3.2: ""(-749.7,164) ""(-739.073,108.136) ""(-688.636,4) ""(-629.613,101.317) ""(-621.7,4) ""(-621.7,164) ""(-607.7,164) ""(-597.073,108.136) ""(-546.636,4) ""(-487.613,101.317) ""(-479.7,4) ""(-479.7,164) ""(-466.7,4) ""(-466.7,164) ""(-417.77,79.698) ""(-366.7,4) ""(-366.7,79.698) ""(-366.7,164) ""(-347.1,120.252) ""(-325.35,161.252) ""(-256.85,120.252) ""(-256.85,161.252) ""(-242.39,4) ""(-242.39,84) ""(-242.39,164) ""(-178.39,4) ""(-178.39,84) ""(-178.39,164) ""(-165.39,4) ""(-165.39,84) ""(-165.39,164) ""(-101.39,4) ""(-101.39,84) ""(-101.39,164) ""(-88.39,4) ""(-88.39,84) ""(-88.39,164) ""(-24.39,4) ""(-24.39,84) ""(-24.39,164) ""(-4,4) ""(-4,164)
  round 5.5 hole 3.2: ""(-333.437,43.992) ""(-333.437,88.392) ""(-265.037,43.992) ""(-265.037,88.392)

## Via types
v1: diameter 0.5, hole 0.3, Top Layer to Bottom Layer, 213 vias
v2: diameter 0.9, hole 0.5, Top Layer to Bottom Layer, 182 vias
v3: diameter 0.7, hole 0.3, Top Layer to Bottom Layer, 112 vias
v4: diameter 1.1, hole 0.7, Top Layer to Bottom Layer, 84 vias
v5: diameter 1.5, hole 0.7, Top Layer to Bottom Layer, 59 vias
v6: diameter 1.7, hole 0.7, Top Layer to Bottom Layer, 58 vias
v7: diameter 0.8, hole 0.3, Top Layer to Bottom Layer, 36 vias
v8: diameter 0.9, hole 0.3, Top Layer to Bottom Layer, 6 vias
v9: diameter 1, hole 0.5, Top Layer to Bottom Layer, 4 vias
v10: diameter 1.1, hole 0.5, Top Layer to Bottom Layer, 4 vias
v11: diameter 0.7, hole 0.5, Top Layer to Bottom Layer, 1 vias
v12: diameter 1.3, hole 0.7, Top Layer to Bottom Layer, 1 vias

## Nets (pads, with @x,y where several pads share a name; then routed paths per layer and width w, separated by ;. In a path a pad name is that pad's centre, name@x,y a point inside that pad or via, vN(x,y) a via of type N, cw(c..) or ccw(c..) an arc to the next point about the centre after c; other vN are vias at no path point)
+2.5V: C14.1 C16.1 C36.1 JB1.101 JB1.102 U5.4 U5.5 | length 14.7
  Top Layer w0.3: C14.1@-316.187,53.6 -315.717,53.13 -315.717,49.471 JB1.101@-315.637,49.391
  Top Layer w0.4: JB1.102@-315.637,43.168 -315.637,39.029 C16.1@-315.357,38.749 ; JB1.102@-315.637,43.328 JB1.101@-315.637,49.056
  other v5: -291.67,25.33 -289.405,25.33 -287.14,25.33 -315.68,46.27
+3.3V: "JTAG CPLD.4" C1.1 C2.1 C3.1 C4.1 C5.1 C6.1 C7.1 C8.1 C9.1 C10.1 C11.1 C12.1 C13.1 C15.1 C17.1 C23.2 C31.2 JB1.29 JB1.30 P4.2 P4.4 P4.6 P4.8 P4.10 P4.12 P4.14 P4.16 P4.18 P4.20 P4.22 P4.24 P4.26 P4.28 P4.30 P4.32 P4.34 P4.36 P4.38 P12.2 P12.4 P12.6 P12.8 P12.10 P12.12 P12.14 P12.16 P12.18 P12.20 P12.22 P12.24 P12.26 P12.28 P12.30 P12.32 P12.34 P12.36 P12.38 P12.40 P16.2 P16.4 P16.6 P16.8 P16.10 P16.12 P16.14 P16.16 P16.18 P16.20 P16.22 P16.24 P16.26 P16.28 P16.30 P16.32 P16.34 P16.36 P16.38 P16.40 P20.43 P20.45 P20.47 P20.49 P20.51 P20.53 P20.55 P20.57 P20.59 P20.61 P20.63 P20.65 P20.67 P20.69 P20.71 P20.73 P20.75 P20.77 P20.79 R3.1 R4.2 R18.1 U2.9 U2.19 U2.25 U2.46 U2.56 U2.64 U2.82 U2.90 U2.100 U2.116 U2.126 U2.136 U4.6 U4.7 X1.1 X1.4 | length 52.8
  Top Layer w0.3: U2.100@-557.564,69.178 -557.554,69.167 -556.683,69.167 -556.197,68.682 v1(-556.197,68.544) ; U2.90@-557.564,74.178 -556.455,74.178 v1(-556.197,74.436) ; U2.82@-557.564,78.178 -556.635,78.178 v1(-556.197,78.616) ; U2.116@-552.197,63.311 -552.197,64.425 -551.937,64.685 v1(-551.656,64.685) ; U2.64@-551.697,84.545 -551.697,83.405 -551.497,83.205 v1(-551.186,83.205) ; v1(-547.928,83.205) -547.697,83.436 U2.56@-547.697,84.545 ; v1(-547.478,64.685) -547.197,64.404 U2.126@-547.197,63.311 ; U2.46@-542.697,84.545 -542.697,83.595 v1(-542.237,83.135) ; U2.136@-542.197,63.311 -542.197,64.465 -541.977,64.685 v1(-541.656,64.685) ; v1(-537.947,74.865) -537.26,74.178 U2.19@-536.33,74.178 ; v1(-537.807,76.785) -537.414,77.178 U2.25@-536.33,77.178 ; v1(-537.767,68.634) -537.223,69.178 U2.9@-536.33,69.178
  Top Layer w0.4: v2(-528.47,83.388) -528.47,81.928 R18.1@-528.46,81.918 ; C13.1@-286.837,39.662 JB1.30@-286.837,43.168 ; JB1.30@-286.837,43.328 JB1.29@-286.837,49.056 ; JB1.29@-286.837,49.391 C15.1@-286.837,54.14
  Bottom Layer w0.3: v1@-547.928,83.166 v1(-547.928,83.205)
  Bottom Layer w0.5: C9.1@-557.627,68.544 v1(-556.197,68.544) ; C8.1@-557.627,74.436 v1(-556.197,74.436) ; C6.1@-557.627,78.616 v1(-556.197,78.616) ; C10.1@-551.656,63.255 v1(-551.656,64.685) ; v1(-551.186,83.205) C5.1@-551.186,84.635 ; v1(-547.928,83.205) C4.1@-547.928,84.635 ; C11.1@-547.478,63.255 v1(-547.478,64.685) ; v1(-542.237,83.135) -542.196,83.176 C3.1@-542.196,84.635 ; C12.1@-541.656,63.255 v1(-541.656,64.685) ; v1(-537.947,74.865) -536.486,74.865 C1.1@-536.337,74.716 ; v1(-537.807,76.785) -537.715,76.877 C2.1@-536.33,76.877 ; v1(-537.767,68.634) C17.1@-536.337,68.634
  other v2: -616.31,114.164 -478.47,114.164 -616.31,115.716 -478.47,115.716 -616.31,117.267 -478.47,117.267 -616.31,118.819 -478.47,118.819 -620.47,120.049 -616.31,120.371 -478.47,120.371 -620.47,121.6 -616.31,121.922 -478.47,121.922 -620.47,123.152 -616.31,123.474 -478.47,123.474 -365.56,125.59 -365.56,127.11 -365.56,128.63 -365.56,130.15
  other v4: -308.646,161.481 -306.812,161.481 -304.978,161.481 -303.144,161.481 -301.31,161.481 -299.476,161.481
  other v5: -286.837,46.23 -56.457,106.218 -56.457,109.175 -56.457,112.131 -56.457,115.088
  other v6: -545.78,80.54